# Altium PCB 发送端V03.PcbDoc
Units mm, origin at the board's own origin, x right, y up, seen from the top; angles counter-clockwise.
Board outline 90.31 x 90.3 mm, 2 copper layers (Top Layer, Bottom Layer); 43 components, 23 nets, 312 pads, 0 vias.
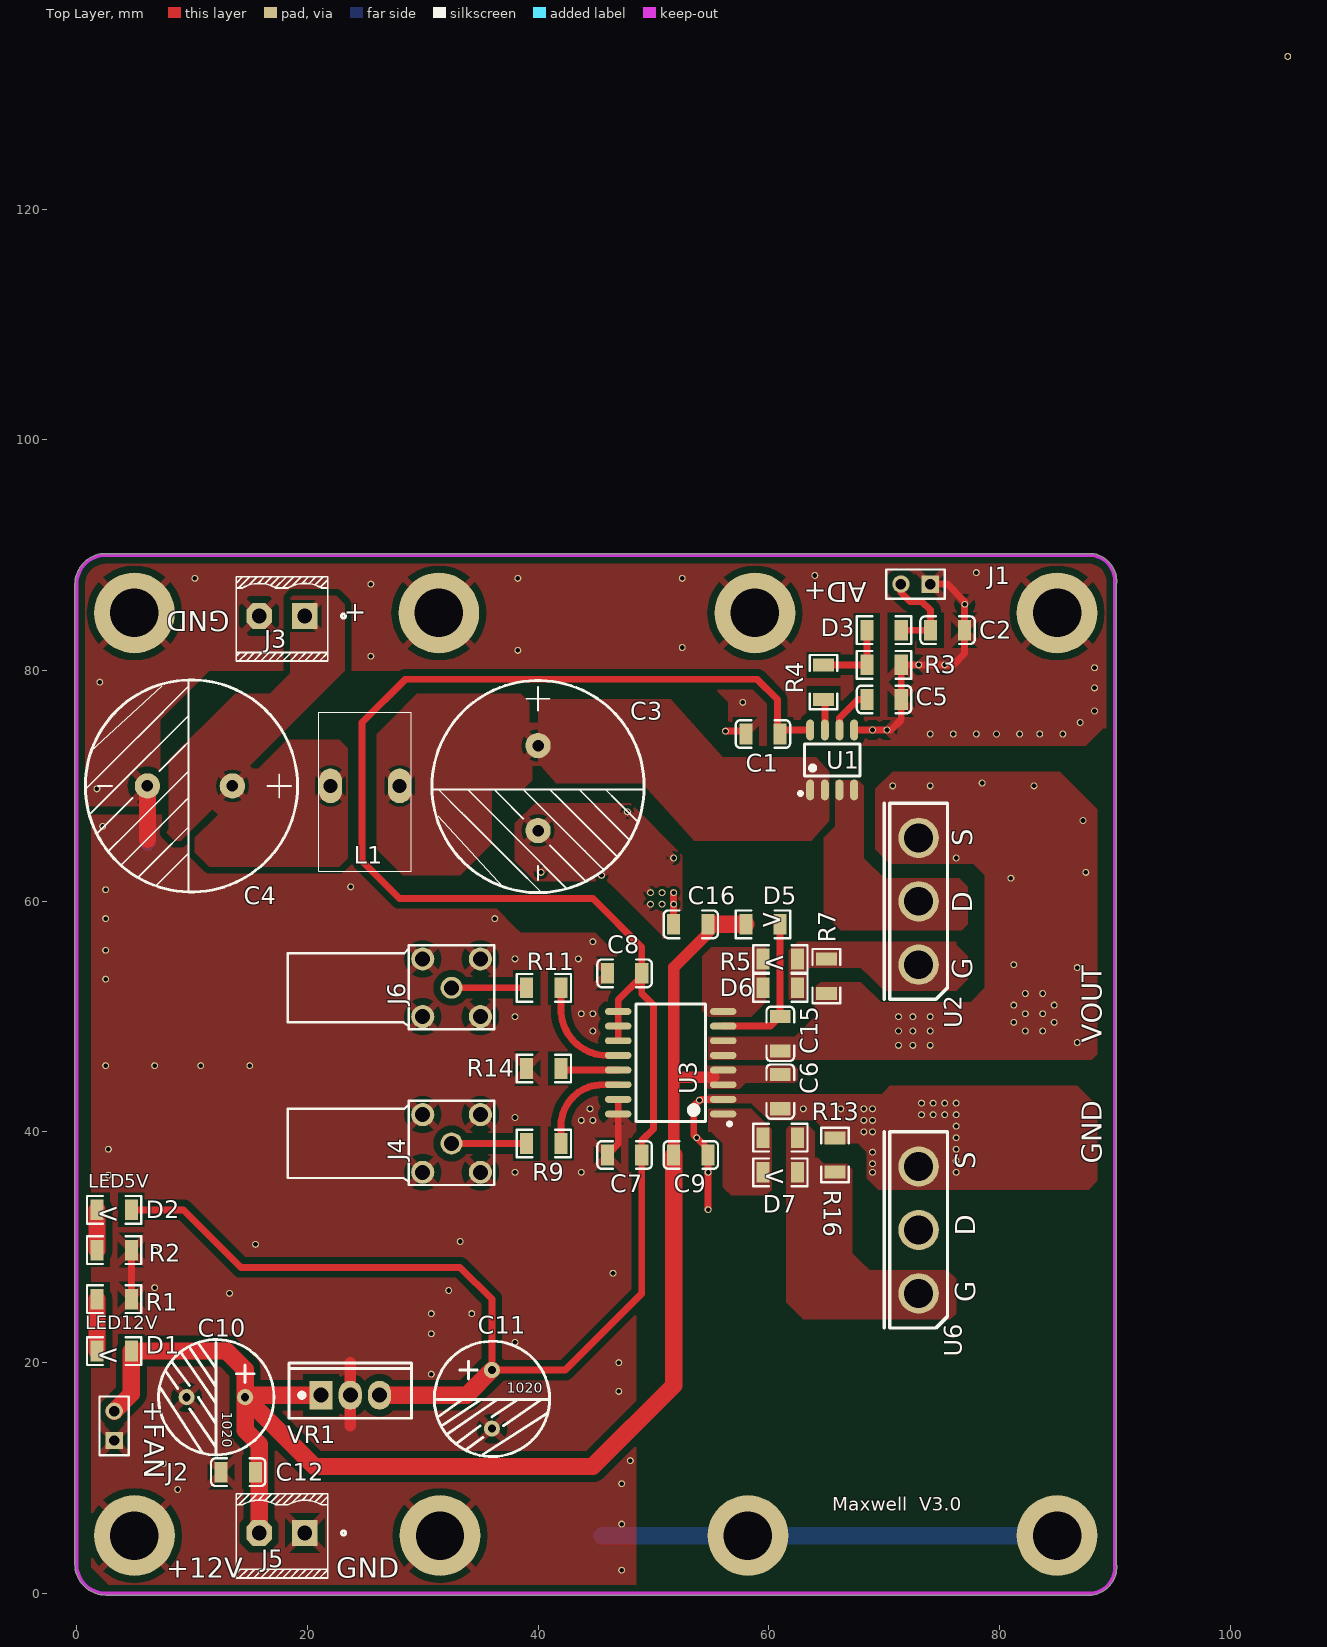
[diagram p0: Top Layer view]
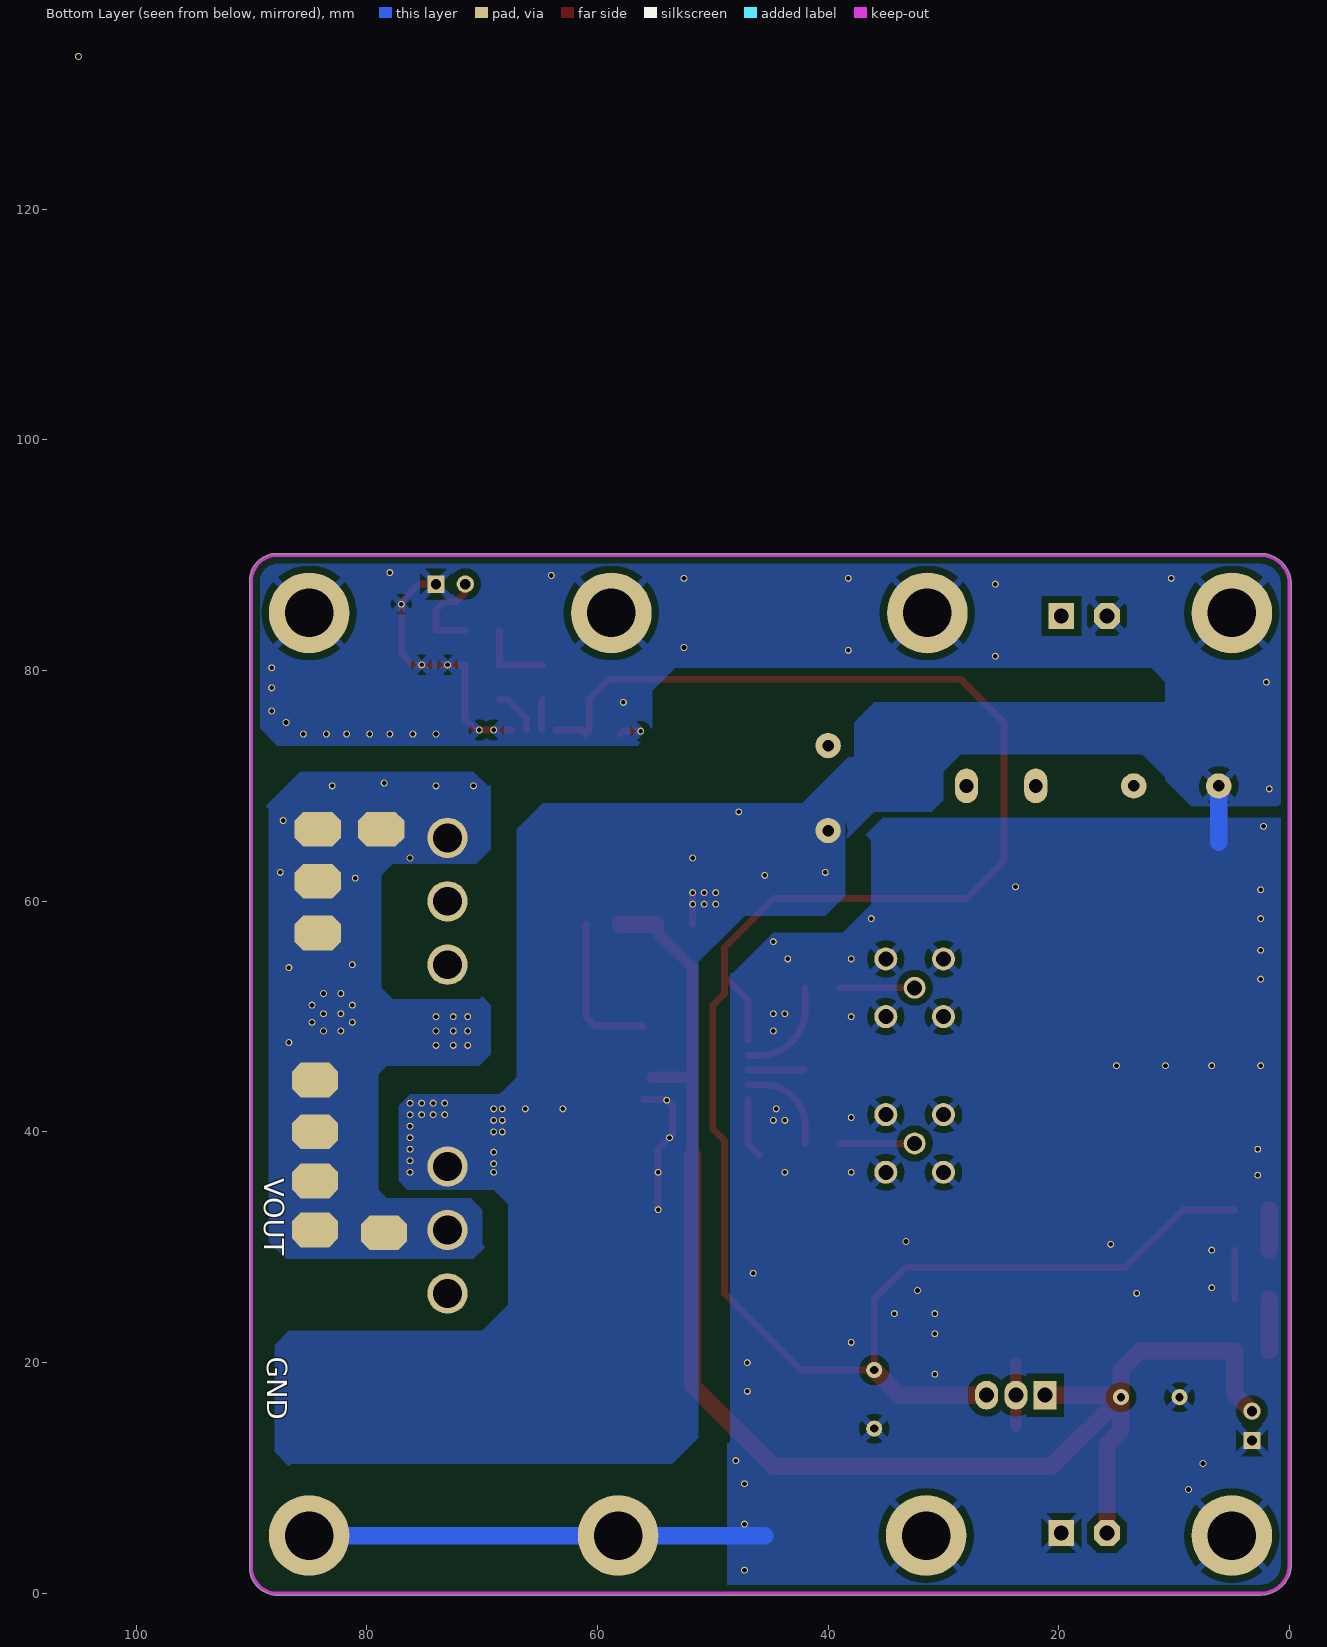
[diagram p1: Bottom Layer view, seen from below]
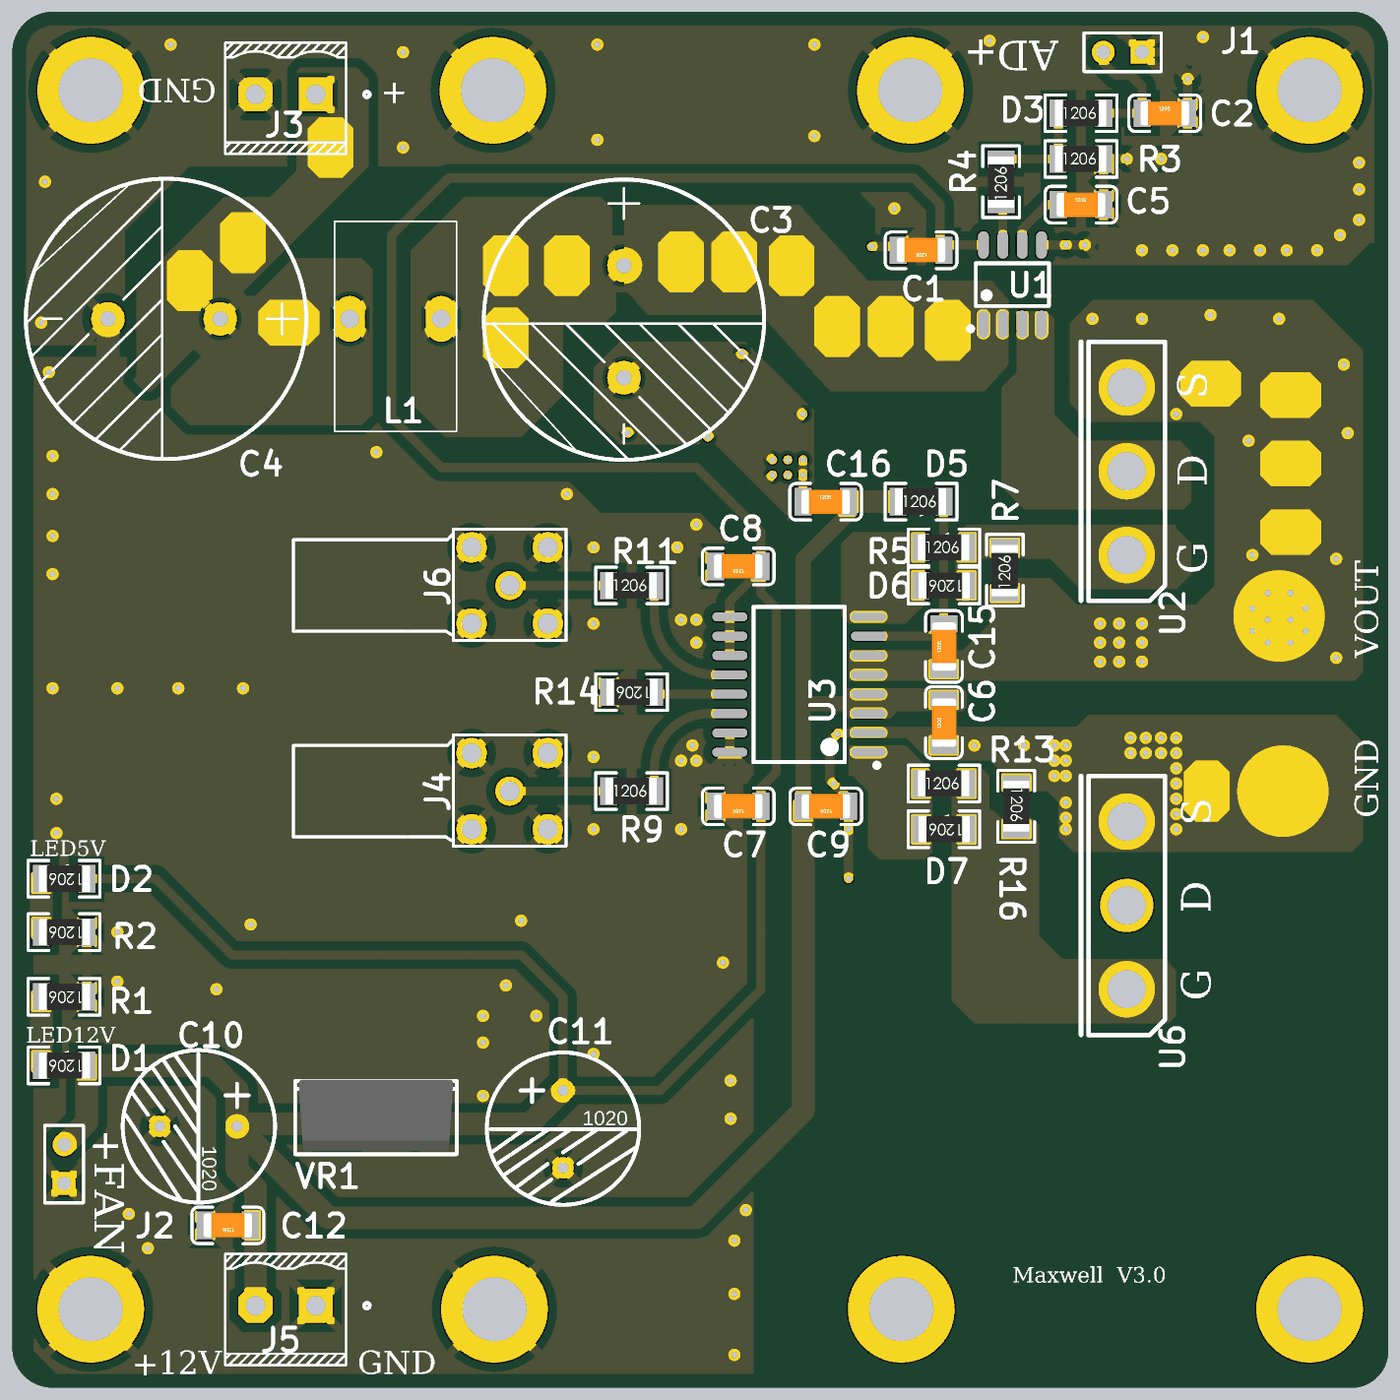
[diagram p2: 3D render of the assembled board from above, using the file's embedded part models]

## Layer stack, top to bottom
Top Layer: signal copper 0.0356
Dielectric: dielectric 0.32, FR-4, Dk 4.8
Bottom Layer: signal copper 0.0356

## Board outline
-0.15,2.5 ccw(c2.5,2.5) 2.5,-0.15 88,-0.15 ccw(c88,0) 88.017,-0.149 ccw(c87.75,2.25) 90.149,1.983 ccw(c87.75,2.25) 90.164,2.25 ccw(c87.75,2.25) 90.15,2.508 90.15,87.492 ccw(c87.75,87.75) 90.164,87.75 ccw(c87.75,87.75) 90.149,88.017 ccw(c87.75,87.75) 88.017,90.149 ccw(c88,90) 88,90.15 2.5,90.15 ccw(c2.5,87.5) -0.15,87.5

## Design rules (kind name [scope] priority, off if disabled: settings)
Clearance [All] p1: gap=0.3
ComponentClearance [All] p1: gap=0 collisioncheckmode=3 verticalgap=0 showdistances=FALSE
HoleSize [All] p1 off: absolutevalues=TRUE maxlimit=2.54 minlimit=0.3 maxpercent=80.000 minpercent=20.000
HoleToHoleClearance [All] p1 off: gap=0.254 allowstackedmicrovias=TRUE
LayerPairs [All] p1 off: enforce=TRUE
MinimumSolderMaskSliver [All] p1 off: minsoldermaskwidth=0.254
NetAntennae [All] p1 off: netantennaetolerance=0
PolygonConnect [All] p1: connectstyle=Relief reliefconductorwidth=0.6 reliefentries=4 polygonreliefangle="45 Angle"
RoutingVias [All] p1: holewidth=0.4 width=0.6 viastyle="Through Hole" minholewidth=0.3 minwidth=0.5 maxholewidth=20 maxwidth=30
SilkToSilkClearance [All] p1 off: silktosilkclearance=0.254
SilkscreenOverComponentPads [IsPad] p1 off: minsilkscreentomaskgap=0.254
SolderMaskExpansion [All] p1: expansion=0.102
Width [All] p1: maxlimit=20 minlimit=0.6 preferedwidth=1
20 further rules are at their usual default settings.

## Components (designator, comment, footprint, x,y, rotation, side; value= is the part's Value field where it differs from the comment)
C1 "01.uF" 1206_C 59.5,74.5 r180 top
C2 "1nF" 1206_C 75.5,83.5 r0 top
C3 "47uF/160V" C3618 40,73.5 r270 top
C4 "47uF/160V" C3618 13.5,70 r180 top
C5 "1nF" 1206_C 70,77.5 r0 top
C6 "47UF/50" 1206_C 61,43.5 r90 top
C7 "10UF/50v" 1206_C 47.5,38 r180 top
C8 "10UF/50v" 1206_C 47.5,53.75 r180 top
C9 "47UF/50" 1206_C 53.25,38 r180 top
C10 "47UF/50" C1020 9.5,17 r0 top
C11 "47UF/50" C1020 36,14.25 r90 top
C12 "10UF" 1206_C 14,10.5 r180 top
C15 "2.2nF" 1206_C 61,48.5 r90 top
C16 "2.2nF" 1206_C 53.24,58 r0 top
D1 "LED3" 1206_R 3.25,21 r180 top
D2 "LED3" 1206_R 3.25,33.25 r180 top
D3 "1N4148" 1206_R 70,83.5 r0 top
D5 "B2100" 1206_R 59.5,58 r0 top
D6 "B2100" 1206_R 61,52.5 r180 top
D7 "B2100" 1206_R 61,36.5 r180 top
J1 "CON-2" HDR1X2 74,87.5 r180 top
J2 "CON-2" HDR1X2 3.25,13.25 r90 top
J3 "CON-2" F396P2-1 18,84.5 r0 top
J4 "CON-2" GPSPIN 35,36.5 r180 top
J5 "CON-2" F396P2-1 18,5 r0 top
J6 "CON-2" GPSPIN 35,50 r180 top
L1 "330mH" H3.3 22,70 r0 top
R1 "5K" 1206_R 3.25,25.5 r180 top
R2 "1K" 1206_R 3.25,29.75 r180 top
R3 "10K" 1206_R 70,80.5 r0 top
R4 "2K" 1206_R 64.75,79 r90 top
R5 "5R" 1206_R 61,55 r0 top
R7 "10K" 1206_R 65,53.5 r90 top
R9 "100R" 1206_R 40.5,39 r0 top
R11 "100R" 1206_R 40.5,52.5 r0 top
R13 "5R" 1206_R 61,39.5 r0 top
R14 "1K" 1206_R 40.5,45.5 r180 top
R16 "10K" 1206_R 65.75,38 r270 top
U1 "ACS712" SOIC-8_150mil 65.5,72.25 r0 top
U2 "IRF530NS" TO-274 73,60 r90 top
U3 "IR2110" SOIC-16_300mil 51.5,46 r90 top
U6 "IRF540" TO-274 73,31.5 r90 top
VR1 "L78M05ABDT-TR" TO-220 21.25,17.25 r0 top

## Footprints (in the part's own frame and the unit in brackets; to place one, negate y for a bottom-side part, rotate by r counter-clockwise, add the part's x,y. Pads: shape width x height; smd on the part's side, far side on the other; paste and mask are expansions set on the pad)
1206_C [mm]
  rect 1.13x1.8 smd: 1(-1.49,0) 2(1.49,0)
  silkscreen extent -2.36,-1.2 2.35,1.2, body extent -1.6,-0.81 1.6,0.79, height 1
1206_R [mm]
  rect 1.13x1.8 smd: 1(-1.49,0) 2(1.49,0)
  silkscreen extent -2.36,-1.2 2.35,1.2, body extent -1.7,-0.86 1.65,0.87, height 0.85
C1020 [mm] "1000UF/25V\\470UF/16V"
  round 1.4 hole 0.7: 1(5.106,-0.001) 2(0.026,-0.001)
  silkscreen extent -2.4,-5 7.6,5
C3618 [mm]
  round 2.2 hole 1: 1(0,0) 2(7.366,0)
  silkscreen extent -5.64,-9.2 12.75,9.2
F396P2-1 [mil]
  rect 88x88 hole 50: 1(70,9)
  oct 88x88 hole 50: 2(-85.91,9)
  silkscreen extent -164,-145 209,143, body extent -167,-148 151,146, height 559
GPSPIN [mm]
  round 1.9 hole 1.3: 1(2.5,-2.5)
  round 2 hole 1.3: 2(0,0) 2(0,-5) 2(5,0) 2(5,-5)
  silkscreen extent -1.2,-6.2 16.7,1.1
H3.3 [mm]
  oval 2x3 hole 1.2: 1(0,0) 2(6,0)
  silkscreen extent -1,-7.4 7,6.4
HDR1X2 [mm]
  rect 1.5x1.5 hole 0.9: 1(0,0)
  round 1.5 hole 0.9: 2(2.54,0)
  silkscreen extent -1.27,-1.27 3.81,1.27
SOIC-8_150mil [mm]
  oval 0.7x1.8 smd: 1(-1.905,-2.6) 2(-0.635,-2.6) 3(0.635,-2.6) 4(1.905,-2.6) 5(1.905,2.6) 6(0.635,2.6) 7(-0.635,2.6) 8(-1.905,2.6)
  silkscreen extent -2.9,-3.05 2.4,1.4
SOIC-16_300mil [mm]
  oval 0.6x2.3 smd: 1(-4.445,-4.55) 2(-3.175,-4.55) 3(-1.905,-4.55) 4(-0.635,-4.55) 5(0.635,-4.55) 6(1.905,-4.55) 7(3.175,-4.55) 8(4.445,-4.55) 9(4.445,4.55) 10(3.175,4.55) 11(1.905,4.55) 12(0.635,4.55) 13(-0.635,4.55) 14(-1.905,4.55) 15(-3.175,4.55) 16(-4.445,4.55)
  silkscreen extent -5.45,-5.25 5.1,3
TO-220 [mm]
  oval 2x2.5 hole 1.3: D(2.468,-0.077) S(5.008,-0.077)
  rect 2x2.5 hole 1.3: G(-0.072,-0.077)
  silkscreen extent -2.83,-2.08 7.77,2.72, body extent -2.6,-1.88 7.54,2.82, height 19.37
TO-274 [mm]
  round 3.5 hole 2.5: D(0,0) G(-5.5,0) S(5.5,0)
  silkscreen extent -8.5,-2.5 8.5,3

## Part data
C1 C2 C3 C4 C5 C6 C7 C8 C9 C10 C11 C12 C15 C16: library part CAP
D1 D2: "Typical BLUE SiC LED"
D3: "1N4148WS IN4148 0805 SOD323 丝印T4 贴片开"
D5 D6 D7: library part 1N4148, "1N4148WS IN4148 0805 SOD323 丝印T4 贴片开"
L1: library part INL, "CD75--2.2mH 222M 贴片功率电感绕线功率电¸"
R1 R2 R3 R4 R5 R7 R9 R11 R13 R14 R16: library part RES
U1: library part 6N137S(TA)_[C16496], "贴片¹"
U2 U6: library part NMOS
VR1: library part "TO-252-2 L78M05ABDT-TR", "低压差线性稳Ñ"

## Free pads (board coordinates)
  round 7 hole 4.2: 0(58.8,85) 1(58.2,5) 2(31.4,85) 3(31.5,5) 3(85,85) 4(5,85) 5(5,5) 6(85,5)
  round 0.6 hole 0.4: 4(56.25,74.75) 5(69,74.85) 6(70.25,74.85) 7(73,80.5) 8(75.25,80.5) 9(77,85.75) 10(51.75,60.75) 11(51.75,59.75) 12(71.25,50) 13(71.25,48.75) 14(71.25,47.5) 15(72.5,50) 16(72.5,48.75) 17(72.5,47.5) 18(74,50) 19(74,48.75) 20(74,47.5) 21(50.75,60.75) 22(50.75,59.75) 23(49.75,59.75) 24(49.75,60.75) 25(81.25,49.5) 26(82.25,50.25) 27(83.75,50.25) 28(84.75,49.5) 29(81.25,51) 30(82.25,48.75) 31(83.75,48.75) 32(84.75,51) 34(82.25,52) 35(83.75,52) 37(30.75,24.25) 38(30.75,22.5) 39(6.75,29.75) 40(6.75,26.5) 41(7.5,11.25) 42(8.75,9) 43(47.25,2) 44(47.25,6) 45(2.5,61) 46(2.5,58.5) 47(2.5,55.75) 48(2.5,53.25) 49(44.5,42) 50(43.75,41) 51(44.75,41) 52(44.75,48.75) 53(43.75,50.25) 54(44.75,50.25) 55(105,133.25) 56(105,133.25) 62(63,42) 63(66.25,42) 64(69,40) 65(69,41) 66(69,42) 67(75.25,41.5) 68(74.25,41.5) 69(76.25,36.5) 70(69,36.5) 71(68.25,42) 72(68.25,41) 73(68.25,40) 74(53.75,39.5) 75(54,42.75) 76(54.74,36.5) 77(54.74,33.26) 80(47,20) 81(47,17.5) 82(46.5,27.75) 83(38,21.75) 84(2.75,36.25) 85(2.75,38.5) 86(70.75,70) 87(74,70) 88(78.5,70.25) 89(83,70) 90(87.25,67) 91(87.5,62.5) 92(81,62) 93(76.25,63.75) 94(86.75,47.75) 95(81.25,54.5) 96(86.75,54.25) 97(13.25,26) 98(32.25,26.25) 99(34.25,24.25) 100(30.75,19) 101(15.5,30.25) 102(33.25,30.5) 103(2.5,45.75) 104(76.25,37.5) 105(76.25,38.5) 106(76.25,39.5) 107(76.25,40.5) 108(76.25,41.5) 109(76.25,42.5) 110(75.25,42.5) 111(74.25,42.5) 112(73.25,42.5) 113(73.25,41.5) 114(69,37.25) 115(69,38.25) 116(57.75,77.25) 117(52.5,82) 118(74,74.5) 119(76,74.5) 120(78,74.5) 121(79.75,74.5) 122(81.75,74.5) 123(83.5,74.5) 124(85.5,74.5) 125(87,75.5) 126(88.25,76.5) 127(88.25,78.5) 128(78,88.5) 129(64,88.25) 130(52.5,88) 131(10.25,88) 132(2,79) 133(25.5,87.5) 134(25.5,81.25) 135(1.75,69.75) 136(38.25,81.75) 137(38.25,88) 138(88.25,80.25) 178(48,11.5) 179(47.25,9.5) 180(6.75,45.75) 181(10.75,45.75) 182(15,45.75) 183(23.75,61.25) 184(36.25,58.5) 185(44.75,56.5) 186(2.25,66.5) 187(51.75,63.75) 188(47.75,67.75) 189(45.5,62.25) 190(40.25,62.5) 192(43.5,55) 193(43.75,36.5) 194(38,36.5) 195(38,41.25) 196(38,50) 197(38,55)
  round 6 on Top Solder: 57(83.25,39) 58(83,50.5)
  round 5 on Bottom Solder: 59(83,50.25) 60(83.25,16.75) 61(84.5,33.5)
  oct 3x4 on Bottom Solder: 139(77.75,16.75) 140(73.5,16.75) 141(69.5,16.75) 142(65.25,16.75) 143(60.75,16.75) 144(56.5,16.5) 145(56.5,21.5) 146(56.5,26.5) 147(61,21.75) 148(60.75,26.75) 149(56.5,31.75) 150(65.25,21.75)
  oct 4x3 smd far side: 151(78.75,66.25) 152(84.25,66.25) 153(84.25,61.75) 154(84.25,57.25) 155(84.5,44.5) 156(84.5,40) 157(84.5,35.75) 158(78.5,31.25) 159(84.5,31.5)
  oct 3x4 on Top Solder: 160(43.75,73.75) 161(47.25,73.75) 162(51,73.5) 163(61.25,69.25) 164(57.5,69.5) 165(54,69.5) 166(36.25,73.5) 167(32.25,73.5) 168(32.25,68.75) 170(20.75,81.25) 171(15,75) 172(11.5,72.5) 177(78.25,39)
  oct 4x3 on Top Solder: 169(18,69.75) 173(78.5,65.75) 174(83.75,65) 175(83.75,60.5) 176(83.75,56)

## Nets (pads, with @x,y where several pads share a name; then routed paths per layer and width w, separated by ;. In a path a pad name is that pad's centre, name@x,y a point inside that pad or via, vN(x,y) a via of type N, cw(c..) or ccw(c..) an arc to the next point about the centre after c; other vN are vias at no path point)
5V: C1.1 C7.1 C8.1 C11.1 D2.1 U1.8 U3.9 U3.10 U3.11 VR1.S | length 187.8
  Top Layer w0.6: D2.1 9.25,33.25 14.25,28.25 33.25,28.25 36.001,25.499 C11.1 42.356,19.356 48.99,25.99 C7.1 48.99,39.24 50,40.25 50,51 48.99,52.01 C8.1@48.99,53.49 ; U3.11 U3.10 U3.9 46.95,51.45 C8.1@48.99,53.49 ; U1.8 61.34,74.85 C1.1 60.75,74.74 60.75,77.5 59,79.25 28.5,79.25 24.75,75.5 24.75,63.5 28,60.25 44.75,60.25 48.99,56.01 C8.1 C8.1@48.99,53.49
  Top Layer w1.5: VR1.S 33.818,17.173 C11.1
12V: C6.2 C9.2 C10.1 C12.1 C16.2 D1.1 D5.1 J2.2 J5.2 U3.3 U3.4 VR1.G | length 127.7
  Top Layer w1: C9.2 51.76,44.75 ; C16.2 54.73,57.23 51.76,54.26 51.76,44.75 ; 55.25,44.75 51.76,44.75
  Top Layer w1.5: J2.2 4.74,17.28 D1.1 ; D1.1@5,21 13,21 14.606,19.394 C10.1 ; J5.2 15.818,12.932 14.606,14.144 C10.1 ; VR1.G 14.78,17.173 C10.1 ; C9.2 51.76,18.01 44.75,11 20.605,11 C10.1 ; C16.2@55,58 D5.1
48V: C4.1 J3.1 L1.1
GND2: C1.2 C2.2 C3.2 C4.2 C5.2 C6.1 C7.2 C8.2 C9.1 C10.2 C11.2 C12.2 C16.1 J1.1 J2.1 J3.2 J4.2 J5.1 J6.2 pad.0 pad.1 pad.2 pad.3 pad.4 pad.5 pad.6 pad.7 pad.8 pad.9 pad.10 pad.11 pad.21 pad.22 pad.23 pad.24 pad.37 pad.38 pad.39 pad.40 pad.41 pad.42 pad.43 pad.44 pad.45 pad.46 pad.47 pad.48 pad.49 pad.50 pad.51 pad.52 pad.53 pad.54 pad.62 pad.63 pad.64 pad.65 pad.66 pad.67 pad.68 pad.69 pad.70 pad.71 pad.72 pad.73 pad.74 pad.75 pad.76 pad.77 pad.80 pad.81 pad.82 pad.83 pad.84 pad.85 pad.97 pad.98 pad.99 pad.100 pad.101 pad.102 pad.103 pad.104 pad.105 pad.106 pad.107 pad.108 pad.109 pad.110 pad.111 pad.112 pad.113 pad.114 pad.115 pad.116 pad.117 pad.118 pad.119 pad.120 pad.121 pad.122 pad.123 pad.124 pad.125 pad.126 pad.127 pad.128 pad.129 pad.130 pad.131 pad.132 pad.133 pad.134 pad.135 pad.136 pad.137 pad.138 pad.178 pad.179 pad.180 pad.181 pad.182 pad.183 pad.184 pad.185 pad.186 pad.187 pad.188 pad.189 pad.190 pad.192 pad.193 pad.194 pad.195 pad.196 pad.197 R1.1 R2.1 R3.2 R14.2 R16.1 U1.5 U3.2 U3.15 U3.16 U6.S VR1.D | length 104.6
  Top Layer w0.6: R1.1 R2.1 ; J6.2@35,49.51 J6.2@35,50 ; C7.2 46.95,38.94 U3.16 U3.15 ; C16.1 pad.10 ; pad.77 C9.1 54.74,38.51 pad.74 53.5,39.75 53.5,42.25 54.075,42.825 U3.2 ; pad.4@56.25,74.75 57.76,74.75 C1.2 ; U1.5 70.6,74.85 71.49,75.74 C5.2 R3.2 76,80.5 76.99,81.49 C2.2 76.99,86.01 75.5,87.5 J1.1
  Top Layer w1: 23.718,14.532 23.718,20
  Top Layer w1.5: 6.134,65.384 C4.2
  Bottom Layer w1.5: 6.134,65.116 C4.2 ; 45.5,5 pad.1 pad.6@85,5
NetC2_1: C2.1 D3.2 J1.2 | length 8.2
  Top Layer w0.6: J1.2 71.46,86.79 72.25,86 73.25,86 74.01,85.24 C2.1 D3.2
NetC3_1: C3.1 L1.2 U1.1 U1.2
NetC5_1: C5.1 U1.6 | length 4.1
  Top Layer w0.6: U1.6 66.135,75.885 67.75,77.5 C5.1
NetC15_1: C15.1 pad.12 pad.13 pad.14 pad.15 pad.16 pad.17 pad.18 pad.19 pad.20 pad.25 pad.26 pad.27 pad.28 pad.29 pad.30 pad.31 pad.32 pad.34 pad.35 pad.86 pad.87 pad.88 pad.89 pad.90 pad.91 pad.92 pad.93 pad.94 pad.95 pad.96 pad.151 pad.152 pad.153 pad.154 pad.155 pad.156 pad.157 pad.158 pad.159 R7.1 U2.S U3.5 U3.6 U6.D
NetC15_2: C15.2 D5.2 U3.7 | length 13.3
  Top Layer w0.6: U3.7 60.165,49.175 60.99,50 D5.2
NetD1_2: D1.2 R1.2 | length 4.5
  Top Layer w1.5: D1.2 R1.2
NetD2_2: D2.2 R2.2 | length 3.5
  Top Layer w1.5: R2.2 D2.2
NetD3_1: D3.1 R3.1 R4.2 | length 6.8
  Top Layer w0.6: R4.2 68.5,80.49 R3.1 D3.1
NetD6_1: D6.1 R5.2 R7.2 U2.G
NetD6_2: D6.2 R5.1 U3.8
NetD7_1: D7.1 R13.2 R16.2 U6.G
NetD7_2: D7.2 R13.1 U3.1
NetJ4_1: J4.1 R9.1 | length 6.5
  Top Layer w0.6: J4.1 R9.1
NetJ6_1: J6.1 R11.1 | length 6.5
  Top Layer w0.6: J6.1 R11.1
NetR4_1: R4.1 U1.7 | length 2.7
  Top Layer w0.6: R4.1 64.865,77.395 U1.7
NetR9_2: R9.2 U3.14 | length 8.5
  Top Layer w0.6: R9.2 41.99,40.503 cw(c45.582,40.503) 45.582,44.095 U3.14
NetR11_2: R11.2 U3.12 | length 9.1
  Top Layer w0.6: R11.2 41.99,50.626 ccw(c45.981,50.626) 45.981,46.635 U3.12
NetR14_1: R14.1 U3.13 | length 4.8
  Top Layer w0.6: R14.1@42.125,45.365 U3.13
NetU1_3: U1.3 U1.4 U2.D

## Polygon pours and split planes (outlines as drawn)
GND2 on Top Layer "Top Layer-No Net" (solid, remove dead copper, pour order 56): 38,66.75 39.75,68.5 48,68.5 52.25,64.25 52.5,64 52.5,57.75 52.5,56.75 50.75,56.75 50.75,57 46.5,61.25 46,61.75 40,61.75 39.75,61.75 38,63.5 38,66.5
GND2 on Top Layer "Top Layer-No Net" (solid, remove dead copper, pour order 86): 87.5,73.5 89,75 89.25,75 89.25,89.75 89,90 88.5,89.5 0.5,89.5 0.5,69 0,68.5 0.25,68.25 5.75,68.25 6.75,68.25 7,68.5 7.25,68.75 7.25,74 7.25,75.75 11.5,80 53.5,80 53.75,80 55.75,78 56.5,77.25 56.5,73.75 57.25,73.75 57.5,73.5 87.5,73.5
GND2 on Top Layer "Top Layer-No Net" (solid, remove dead copper, pour order 75): 48.5,0.75 48.5,52.76 48.99,53.25 45,57.24 45,57.25 38.5,57.25 38,57.75 36,59.75 36,60 36,66 34.5,67.5 1.25,67.5 1.25,2.25 2.5,1 3,0.5 48.25,0.5
GND2 on Top Layer "Top Layer-No Net" (solid, remove dead copper, pour order 69): 69.5,35 87.25,35 87.75,35 88.5,35.75 88.5,42.25 87.25,43.5 86.75,44 70.5,44 70,43.5 69.5,43 69.5,35
NetC15_1 on Top Layer "Top Layer-No Net" (solid, remove dead copper, pour order 65): 54.75,46.25 54.75,48.25 62.25,48.25 64,50 64,52.5 64.25,52.75 64.5,53 67.25,53 68,53 69.75,51.25 77.5,51.25 78.75,52.5 78.75,62.25 77.75,63.25 70.5,63.25 69.25,64.5 69.25,69.75 70.75,71.25 85.25,71.25 88.5,68 88.5,47.25 88.5,46.75 88,46.25 54.75,46.25
NetC3_1 on Top Layer "Top Layer-No Net" (solid, remove dead copper, pour order 54): 40,75.5 39.25,75.5 39.25,77.25 38.75,77.75 38.5,78 29.5,78 27.25,75.75 26,74.5 26,68.5 26,64.5 28.25,62.25 33,62.25 33.25,62.25 34,63 36,65 36,69.75 38.75,69.75 39,70 39.5,70.5 39.5,71.75 40.5,71.75 40.75,72 40.75,75.5 40,75.5
48V on Top Layer "Top Layer-No Net" (solid, remove dead copper, pour order 50): 18.5,86.25 18.75,86.5 22,86.5 22.5,86.5 23,86 23.25,85.75 23.25,84.75 23.25,80 15,71.75 15.25,71.5 15.5,71.5 15.75,71.5 17,72.75 18.25,74 22.75,74 23.5,73.25 23.5,64 23.5,63.75 22.75,63 12.25,63 11.5,63 10.5,64 10.25,64.25 10.25,65 10.25,65.5 12.25,67.5 11.75,68 10,66.25 9,65.25 8.5,65.25 7.75,66 8,66.25 8,71.75 8,72.25 13.25,77.5 13.75,78 16.5,78 16.75,78 17.25,78.5 18.5,79.75 18.5,86
NetD7_2 on Top Layer "Top Layer-No Net" (solid, remove dead copper, pour order 48): 54.75,42 58.5,42 60,40.5 60.25,40.25 60.25,35.5 60.25,35 59.75,34.5 58.75,34.5 56.75,34.5 56.25,35 56,35.25 56,39 55.25,39.75 55,40 54.75,40 54.75,42
12V on Top Layer "Top Layer-No Net" (solid, remove dead copper, pour order 46): 54.5,45.75 62.25,45.75 62.5,45.5 62.5,44.5 62.25,44.25 58.25,44.25 58,44.25 57.5,43.75 55,43.75 54.75,43.75 54.5,44 54.5,45.75
GND2 on Top Layer "Top Layer-No Net" (solid, remove dead copper, pour order 44): 55,42.5 58.5,42.5 60,41 60.25,41 64,41 64.5,40.5 64.75,40.25 64.75,39 67.75,39 68,38.75 68.5,38.25 68.5,36.5 68.5,36 69.5,35 76.5,35 77.25,35.75 77.25,41.75 77.25,42.25 76.25,43.25 55,43.25 54.75,43.25 54.75,42.5 55,42.5
NetD7_1 on Top Layer "Top Layer-No Net" (solid, remove dead copper, pour order 42): 61.75,40.5 61.5,40.25 61.5,25.25 63,23.75 75.25,23.75 75.75,23.75 76.25,24.25 76.25,27 76.25,27.25 75.5,28 69.25,28 68.75,28 68,28.75 67.25,29.5 67.25,35.75 67.25,36.75 67,37 66.75,37.25 66.25,37.25 64.75,37.25 64.5,37.5 64.25,37.75 64,37.75 64,40 63.5,40.5 61.75,40.5
NetD6_2 on Top Layer "Top Layer-No Net" (solid, remove dead copper, pour order 36): 54.75,50 58.5,50 59.25,50.75 59.75,51.25 59.75,54.75 59.75,56 55.75,56 55,56 54.25,55.25 54.25,50.5 54.75,50
NetD6_1 on Top Layer "Top Layer-No Net" (solid, remove dead copper, pour order 34): 77.25,55.25 76.25,56.25 76.25,56.5 62.5,56.5 61.75,55.75 61.75,51.5 63.25,51.5 63.25,54 63.5,54.25 66.5,54.25 68,54.25 69,53.25 70,52.25 70.75,52.25 76.25,52.25 77.25,53.25 77.25,55.25
NetC3_1 on Top Layer "Top Layer-No Net" (solid, remove dead copper, pour order 32): 65.25,67 65.25,71.25 64.123,72.5 63.897,72.5 56.007,72.5 51.498,77.5 40,77.5 40,72 40.902,71 41.578,70.25 48.342,70.25 49.018,70.25 52.4,66.5 53.527,65.25 63.221,65.25 63.672,65.25 65.25,67
NetU1_3 on Top Layer "Top Layer-No Net" (solid, remove dead copper, pour order 30): 70.5,62 76.5,62 77,61.5 77.25,61.25 77.25,58.75 77.25,58 76.75,57.5 69,57.5 66.25,57.5 65,58.75 64.75,59 64.75,64.5 64.75,65.5 65.75,66.5 65.75,70.5 67.75,70.5 68.25,70 68.25,64.25 68.25,63.75 70,62 70.5,62
GND2 on Bottom Layer "Top Layer-No Net" (solid, remove dead copper, pour order 81): 6.5,77.25 36,77.25 37.25,76 37.75,75.5 37.75,72.5 38.25,72.5 42.5,68.25 43,67.75 43,63.5 43,63 42.5,62.5 42.25,62.25 38.5,62.25 38.5,65.25 36,67.75 31,67.75 30,68.75 30,71.25 28.5,72.75 20,72.75 12.75,72.75 10.5,70.5 10.25,70.25 6.5,70.25 6.5,77.25 6.25,77.5
GND2 on Bottom Layer "Top Layer-No Net" (solid, remove dead copper, pour order 77): 56.5,73.5 87.75,73.5 90,75.75 90,89.75 0,89.75 0,69.25 1,68.25 8,68.25 8.5,68.25 9.5,69.25 10.75,70.5 10.75,78.75 10.75,79 11.5,79.75 12,80.25 36.25,80.25 53.25,80.25 55.25,78.25 55.25,77.75 55.25,74.75 55.5,74.5 56.5,73.5
GND2 on Bottom Layer "Top Layer-No Net" (solid, remove dead copper, pour order 73): 48.5,13 48.5,53.75 48.25,53.75 44.75,57.25 39,57.25 38.75,57.25 37.25,58.75 36.25,59.75 36.25,65 36.25,65.25 36.75,65.75 35.25,67.25 18.25,67.25 0,67.25 -0.25,67 0,66.75 0,-0.25 48.25,-0.25 48.5,0 48.75,0.25 48.75,13
GND2 on Bottom Layer "Top Layer-No Net" (solid, remove dead copper, pour order 71): 39.75,68.5 48,68.5 64.75,68.5 66.75,66.5 67,66.25 67,50.5 67,44.75 68,43.75 68.5,43.25 76,43.25 76.25,43.25 76.5,43 77.25,42.25 77.25,35.75 76.5,35 69.75,35 69,35 68,34 67.75,33.75 67.75,28.25 67.75,25 69.25,23.5 70,22.75 86.25,22.75 86.75,22.75 88,21.5 88,12.5 88,12.25 86.75,11 86.5,11.25 54.5,11.25 53.5,11.25 51.75,13 51.25,13.5 51.25,54 51.25,54.75 48.5,57.5 47.25,58.75 40.75,58.75 40.25,58.75 38.5,60.5 38.5,66.75 38.5,67.25 40,68.75
NetC15_1 on Bottom Layer "Top Layer-No Net" (solid, remove dead copper, pour order 62): 77.75,63.25 70.5,63.25 69.25,64.5 69.25,70 69.5,70 70.75,71.25 85.25,71.25 85.75,71.25 88.75,68.25 88.5,68 88.5,30.5 87,29 71.25,29 70.75,29 69.75,30 70,30.25 70,33 70,33.25 71,34.25 78,34.25 78.25,34.25 79,35 79,45 78.25,45.75 70.5,45.75 70.25,45.75 69.25,46.75 69.25,50.75 69.25,51 70,51.75 70.25,51.5 77.25,51.5 77.75,51.5 78.75,52.5 78.75,62.25 77.75,63.25
GND2 on Bottom Paste "Top Layer-No Net" (solid, remove dead copper): 79.25,42.25 79.75,42.75 86.25,42.75 86.25,42.5 86.5,42.25 86.5,37.25 86.5,37 85.75,36.25 85.5,36 80.25,36 80,36 79.25,36.75 79.25,42.25

## Keep-outs
Keep-Out Layer:
  lines w0.3: 0,11 0,87.5 cw(c2.5,87.5) 2.5,90 88,90 cw(c87.75,87.75) 90,87.5 ; 0,12 0,2.5 ccw(c2.5,2.5) 2.5,0 88,0 ccw(c87.75,2.25) 90,2.5 ; 90,2 90,80 ; 90,78.5 90,88

## Silkscreen, mask and mechanical layers (free items; w line width, h text height)
Top Overlay:
  text "AD+" at 68.5,88.25 h3 r180
  text "GND" at 13.25,85.75 h3 r180
  text "+" at 25.5,84 h3 r90
  text "S" at 78.25,64.75 h3 r90
  text "D" at 78.25,59 h3 r90
  text ">" at 59.25,57 h3
  text ">" at 61.5,56 h3 r180
  text "G" at 78.25,53.25 h3 r90
  text "VOUT" at 89.5,47.75 h3 r90
  text ">" at 61.5,37.5 h3 r180
  text "GND" at 89.5,37.25 h3 r90
  text "S" at 78.5,36.75 h3 r90
  text "LED5V" at 1,34.75 h2
  text ">" at 3.75,34.25 h3 r180
  text "D" at 78.5,31 h3 r90
  text "G" at 78.5,25.25 h3 r90
  text "LED12V" at 0.75,22.5 h2
  text ">" at 3.75,22 h3 r180
  text "+FAN" at 5.25,16.75 h3 r270
  text "Maxwell  V3.0" at 65.5,6.75 h2
  text "+12V" at 7.75,0.75 h3
  text "GND" at 22.5,0.75 h3
Bottom Overlay:
  text "VOUT" at 89.5,36 h3 r90
  text "GND" at 89.25,20.5 h3 r90

## Text inside footprints (layer, text, board x,y; h text height)
C10: Top Overlay "1020" at 12.32,15.729 h1.52 r270
C11: Top Overlay "1020" at 37.271,17.07 h1.52